# EAGLE board CT_schematic (EAGLE 7.6.0)

Size 100 x 80 mm. Coordinates in mm from the lower left corner, seen from the top.
Outline: 0,0 100,0 100,80 0,80 0,0
Copper layers (1*16): Top 0.035mm / dielectric 1.5mm / Bottom 0.035mm
Design rules "default": minimum track width 10mil, minimum drill 24mil, track to track 8mil, track to pad 8mil, pad to pad 8mil, via to via 8mil, smd to smd 8mil, copper to edge 40mil, drill to drill 8mil, minimum pad ring 10mil, minimum via ring 8mil, stop-mask expansion 4mil, vias tented up to drill 0mil, thermal gap 10mil

## Footprints (pad centres in the part's own frame; a part is rotated, then mirrored left to right if it is on the bottom)
C0603 = smd 0.8 x 0.8: 1 -0.762,0; 2 0.762,0
C0402 = smd 0.5 x 0.5: 1 -0.508,0; 2 0.508,0
C1210 = smd 1.2 x 2.5: 1 -1.524,0; 2 1.524,0
EXV-9H = smd 3.505 x 1.676: 1 -2.857,0; 2 2.857,0
L0603 = smd 0.8 x 0.8: 1 -0.762,0; 2 0.762,0
PJ-037B_PACKAGE = drill 3.7 square: 1 12,0 | drill 3.2 square: 2 6,0
R0603 = smd 0.8 x 0.8: 1 -0.762,0; 2 0.762,0
LFBGA100 = smd 0.52 x 0.52: A1 -3.6,3.6; A2 -2.8,3.6; A3 -2,3.6; A4 -1.2,3.6; A5 -0.4,3.6; A6 0.4,3.6; A7 1.2,3.6; A8 2,3.6; A9 2.8,3.6; A10 3.6,3.6; B1 -3.6,2.8; B2 -2.8,2.8; B3 -2,2.8; B4 -1.2,2.8; B5 -0.4,2.8; B6 0.4,2.8; B7 1.2,2.8; B8 2,2.8; B9 2.8,2.8; B10 3.6,2.8; C1 -3.6,2; C2 -2.8,2; C3 -2,2; C4 -1.2,2; C5 -0.4,2; C6 0.4,2; C7 1.2,2; C8 2,2; C9 2.8,2; C10 3.6,2; D1 -3.6,1.2; D2 -2.8,1.2; D3 -2,1.2; D4 -1.2,1.2; D5 -0.4,1.2; D6 0.4,1.2; D7 1.2,1.2; D8 2,1.2; D9 2.8,1.2; D10 3.6,1.2; E1 -3.6,0.4; E2 -2.8,0.4; E3 -2,0.4; E4 -1.2,0.4; E5 -0.4,0.4; E6 0.4,0.4; E7 1.2,0.4; E8 2,0.4; E9 2.8,0.4; E10 3.6,0.4; F1 -3.6,-0.4; F2 -2.8,-0.4; F3 -2,-0.4; F4 -1.2,-0.4; F5 -0.4,-0.4; F6 0.4,-0.4; F7 1.2,-0.4; F8 2,-0.4; F9 2.8,-0.4; F10 3.6,-0.4; G1 -3.6,-1.2; G2 -2.8,-1.2; G3 -2,-1.2; G4 -1.2,-1.2; G5 -0.4,-1.2; G6 0.4,-1.2; G7 1.2,-1.2; G8 2,-1.2; G9 2.8,-1.2; G10 3.6,-1.2; H1 -3.6,-2; H2 -2.8,-2; H3 -2,-2; H4 -1.2,-2; H5 -0.4,-2; H6 0.4,-2; H7 1.2,-2; H8 2,-2; H9 2.8,-2; H10 3.6,-2; J1 -3.6,-2.8; J2 -2.8,-2.8; J3 -2,-2.8; J4 -1.2,-2.8; J5 -0.4,-2.8; J6 0.4,-2.8; J7 1.2,-2.8; J8 2,-2.8; J9 2.8,-2.8; J10 3.6,-2.8; K1 -3.6,-3.6; K2 -2.8,-3.6; K3 -2,-3.6; K4 -1.2,-3.6; K5 -0.4,-3.6; K6 0.4,-3.6; K7 1.2,-3.6; K8 2,-3.6; K9 2.8,-3.6; K10 3.6,-3.6
TDFN-8/6MM = smd 0.3 x 0.75: 1 0,0; 2 0.5,0; 3 1,0; 4 1.5,0; 5 1.5,3; 6 1,3; 7 0.5,3; 8 0,3
FCI_10118193-0001LF = smd 0.4 x 1.35: 1 -1.3,2.675; 2 -0.65,2.675; 3 0,2.675; 4 0.65,2.675; 5 1.3,2.675 | smd 1.6 x 1.4: 6 -3.2,2.45; 7 3.2,2.45 | smd 1.9 x 1.9: 8 -1.2,0; 9 1.2,0 | hole 0.5: -3.3,0; 3.3,0
SOT143B = smd 1 x 0.7: 1 -0.75,-1 | smd 0.6 x 0.7: 2 0.95,-1; 3 0.95,1; 4 -0.95,1
ABS07-32.768KHZ-7-T = smd 1.1 x 2.4: 1 -2.5,0; 2 0,0
ASFL1 = smd 1.7 x 1.5: 1 -1.27,-1.1; 2 1.27,-1.1; 3 1.27,1.1; 4 -1.27,1.1
WSON-8 = smd 0.3 x 0.6: 1 -0.75,0; 2 0.05,0; 3 0.85,0; 4 1.65,0; 5 1.65,3.8; 6 0.85,3.8; 7 0.05,3.8; 8 -0.75,3.8 | smd 3 x 2.6: PAD 0.45,1.9
SON-6 = smd 0.55 x 0.3: 1 -0.355,0.5 | smd 0.52 x 0.3: 2 -0.37,0; 3 -0.37,-0.5; 4 0.37,-0.5; 5 0.37,0; 6 0.37,0.5
SW_4-1437565-2 = smd 1.4 x 2.1: 1 -2.23,4.55; 2 -2.23,-4.55; 3 2.23,4.55; 4 2.23,-4.55
LGM67K-G1J2-24-Z = smd 0.8 x 1.4: A -2,0; C 0,0
NC7SZ125M5X = smd 1.3 x 0.7: 1 -1.3,0.95; 2 -1.3,0; 3 -1.3,-0.95; 4 1.3,-0.95; 5 1.3,0.95

## Placement (x,y rotation side)
C1  1e-06  [C0603]  -15.24,49.53 0 top  (outside the outline)
C2  1e-07  [C0603]  -19.05,49.53 0 top  (outside the outline)
C3  1e-07  [C0603]  -22.86,49.53 0 top  (outside the outline)
C4  1e-07  [C0603]  -26.67,49.53 0 top  (outside the outline)
C5  1e-07  [C0603]  -30.48,49.53 0 top  (outside the outline)
C6  1e-07  [C0603]  -34.29,49.53 0 top  (outside the outline)
C7  1e-07  [C0603]  -38.1,49.53 0 top  (outside the outline)
C8  4.7e-06  [C0603]  -59.69,44.45 0 top  (outside the outline)
C9  1e-08  [C0603]  -41.91,49.53 0 top  (outside the outline)
C10  1e-06  [C0603]  -45.72,49.53 0 top  (outside the outline)
C11  1e-11  [C0402]  -38.1,54.61 0 top  (outside the outline)
C12  1e-11  [C0402]  -41.91,54.61 0 top  (outside the outline)
C13  1e-08  [C0402]  -45.72,54.61 0 top  (outside the outline)
C14  1e-08  [C0402]  -49.53,54.61 0 top  (outside the outline)
C15  1e-08  [C0402]  -53.34,54.61 0 top  (outside the outline)
C16  1e-08  [C0402]  -57.15,54.61 0 top  (outside the outline)
C17  1e-05  [C1210]  -48.26,38.1 0 top  (outside the outline)
C18  1e-05  [C1210]  -54.61,38.1 0 top  (outside the outline)
C19  1e-07  [C0402]  -60.96,54.61 0 top  (outside the outline)
C20  0.0001  [EXV-9H]  -45.72,29.21 0 top  (outside the outline)
C21  0.0001  [EXV-9H]  -57.15,29.21 0 top  (outside the outline)
C22  1e-08  [C0402]  -15.24,59.69 0 top  (outside the outline)
F1  240.0  [L0603]  -49.53,49.53 0 top  (outside the outline)
J1  PJ-037B  [PJ-037B_PACKAGE]  -43.18,7.62 0 top  (outside the outline)
R2  1000.0  [R0603]  -53.34,49.53 0 top  (outside the outline)
R4  4700.0  [R0603]  -57.15,49.53 0 top  (outside the outline)
R5  2200.0  [R0603]  -60.96,49.53 0 top  (outside the outline)
R6  2200.0  [R0603]  -15.24,54.61 0 top  (outside the outline)
R7  2200.0  [R0603]  -19.05,54.61 0 top  (outside the outline)
R8  2200.0  [R0603]  -22.86,54.61 0 top  (outside the outline)
R9  10000.0  [R0603]  -30.48,44.45 0 top  (outside the outline)
R10  10000.0  [R0603]  -35.56,44.45 0 top  (outside the outline)
R11  10000.0  [R0603]  -40.64,44.45 0 top  (outside the outline)
R12  10000.0  [R0603]  -45.72,44.45 0 top  (outside the outline)
R13  100000.0  [R0603]  -15.24,44.45 0 top  (outside the outline)
R14  2231.0  [R0603]  -26.67,54.61 0 top  (outside the outline)
R15  1000.0  [R0603]  -30.48,54.61 0 top  (outside the outline)
R16  10000.0  [R0603]  -50.8,44.45 0 top  (outside the outline)
R17  10000.0  [R0603]  -55.88,44.45 0 top  (outside the outline)
R18  9100.0  [R0603]  -34.29,54.61 0 top  (outside the outline)
R19  680000.0  [R0603]  -20.32,44.45 0 top  (outside the outline)
R20  120000.0  [R0603]  -25.4,44.45 0 top  (outside the outline)
U1  stm32f103vbh7  [LFBGA100]  -22.86,7.62 0 top  (outside the outline)
U2  24AA08T-I/MNY  [TDFN-8/6MM]  -24.13,19.05 0 top  (outside the outline)
U3  24AA64T-I/MNY  [TDFN-8/6MM]  -38.1,19.05 0 top  (outside the outline)
U4  10118193-0001LF  [FCI_10118193-0001LF]  -35.56,29.21 0 top  (outside the outline)
U5  prtr5v0u2ax  [SOT143B]  -27.94,59.69 0 top  (outside the outline)
U6  ABS07-32.768KHZ-7-T  [ABS07-32.768KHZ-7-T]  -27.94,38.1 0 top  (outside the outline)
U7  ASFL1-25MHZ-NCS  [ASFL1]  -26.67,29.21 0 top  (outside the outline)
U8  LP3878SDX-ADJ/NOPB  [WSON-8]  -58.42,17.78 0 top  (outside the outline)
U9  TPS3895ADRYR  [SON-6]  -31.75,58.42 0 top  (outside the outline)
U10  4-1437565-2  [SW_4-1437565-2]  -59.69,6.35 0 top  (outside the outline)
U11  Q65110A2395  [LGM67K-G1J2-24-Z]  -36.83,38.1 0 top  (outside the outline)
U12  nc7sz125m5x  [NC7SZ125M5X]  -59.69,36.83 0 top  (outside the outline)

## Library data of the parts
C1-C22 F1 J1 R2 R4-R20 U1-U12 = circuit_tree

## Nets
CLK_CRYSTAL_U1_A1: C11.1 U1.A1 U6.1
CLK_CRYSTAL_U1_B1: C12.1 U1.B1 U6.2
CLK_U1_C1: U1.C1 U7.3
GND: C1.2 C2.2 C3.2 C4.2 C5.2 C6.2 C7.2 C8.2 C9.2 C10.2 C11.2 C12.2 C13.2 C14.2 C15.2 C16.2 C17.2 C18.2 C19.2 C20.2 C21.2 C22.2 J1.2 R2.2 R9.2 R10.2 R11.2 R15.2 R18.2 R20.2 U1.C2 U1.E4 U1.E5 U1.E6 U1.E7 U1.G1 U1.H1 U2.4 U2.7 U3.4 U3.7 U4.5 U4.6 U4.7 U4.8 U4.9 U5.1 U7.2 U8.3 U8.PAD U9.2 U11.C U12.1 U12.3
NET_U1_A4: R6.1 U1.A4 U2.5
NET_U1_B4: R5.1 U1.B4 U2.6
NET_U1_D5: R9.1 U1.D5
NET_U1_E1: R4.1 U1.E1 U12.4
NET_U1_J7: R7.1 U1.J7 U3.6
NET_U1_K1: C9.1 C10.1 F1.1 U1.J1 U1.K1
NET_U1_K7: R8.1 U1.K7 U3.5
NET_U1_K9: U11.A
NET_U1_K10: U10.3 U10.4
NET_U3_1: R10.1 U3.1
NET_U3_2: R11.1 U3.2
NET_U3_3: R12.1 U3.3
NET_U5_4: U4.1 U5.4
NET_U8_1: C16.1 U8.1
NET_U8_6: R14.2 R15.1 U8.6
NET_U8_8: R13.1 U8.8
NET_U9_1: R17.1 R18.1 U9.1
NET_U9_3: R19.2 R20.1 U9.3
NET_U9_4: R16.1 U9.4 U12.2
NET_U10_1: R2.1 U10.1 U10.2
PROC_USB_DM: U1.C10 U4.2 U5.3
PROC_USB_DP: U1.B10 U4.3 U5.2
VCC_S1_14V8: C17.1 C20.1 C21.1 J1.1 R13.2 U8.4
VCC_TIER1_3V3: C1.1 C2.1 C3.1 C4.1 C5.1 C6.1 C7.1 C8.1 C13.1 C14.1 C15.1 C18.1 C19.1 C22.1 F1.2 R4.2 R5.2 R6.2 R7.2 R8.2 R12.2 R14.1 R16.2 R17.2 R19.1 U1.B2 U1.D2 U1.F4 U1.F5 U1.F6 U1.F7 U2.8 U3.8 U7.4 U8.5 U9.6 U12.5

## Tracks (layer width: path | path; a pad name or v marks a point on that pad's centre or on a via)
CLK_CRYSTAL_U1_A1  (2 unrouted)
CLK_CRYSTAL_U1_B1  (2 unrouted)
CLK_U1_C1  (1 unrouted)
GND  (53 unrouted)
NET_U1_A4  (2 unrouted)
NET_U1_B4  (2 unrouted)
NET_U1_D5  (1 unrouted)
NET_U1_E1  (2 unrouted)
NET_U1_J7  (2 unrouted)
NET_U1_K1  (4 unrouted)
NET_U1_K7  (2 unrouted)
NET_U1_K10  (1 unrouted)
NET_U3_1  (1 unrouted)
NET_U3_2  (1 unrouted)
NET_U3_3  (1 unrouted)
NET_U5_4  (1 unrouted)
NET_U8_1  (1 unrouted)
NET_U8_6  (2 unrouted)
NET_U8_8  (1 unrouted)
NET_U9_1  (2 unrouted)
NET_U9_3  (2 unrouted)
NET_U9_4  (2 unrouted)
NET_U10_1  (2 unrouted)
PROC_USB_DM  (2 unrouted)
PROC_USB_DP  (2 unrouted)
VCC_S1_14V8  (5 unrouted)
VCC_TIER1_3V3  (36 unrouted)